# Altium PCB ZYNQ-HS-DEV-PCB.PcbDoc (part 5 of 10)
Units mm, origin at the board's own origin, x right, y up, seen from the top; angles counter-clockwise.
Board outline 125.25 x 111 mm, 10 copper layers (S1 (SIG), S2 (GND), S3 (SIG), S4 (GND), S5 (PWR), S6 (SIG), S7 (GND), S8 (SIG), S9 (GND), S10 (SIG)), stack 1.597 mm thick; 539 components, 408 nets, 2443 pads, 876 vias.
Unrouted connection lines stored in the file: 1310.
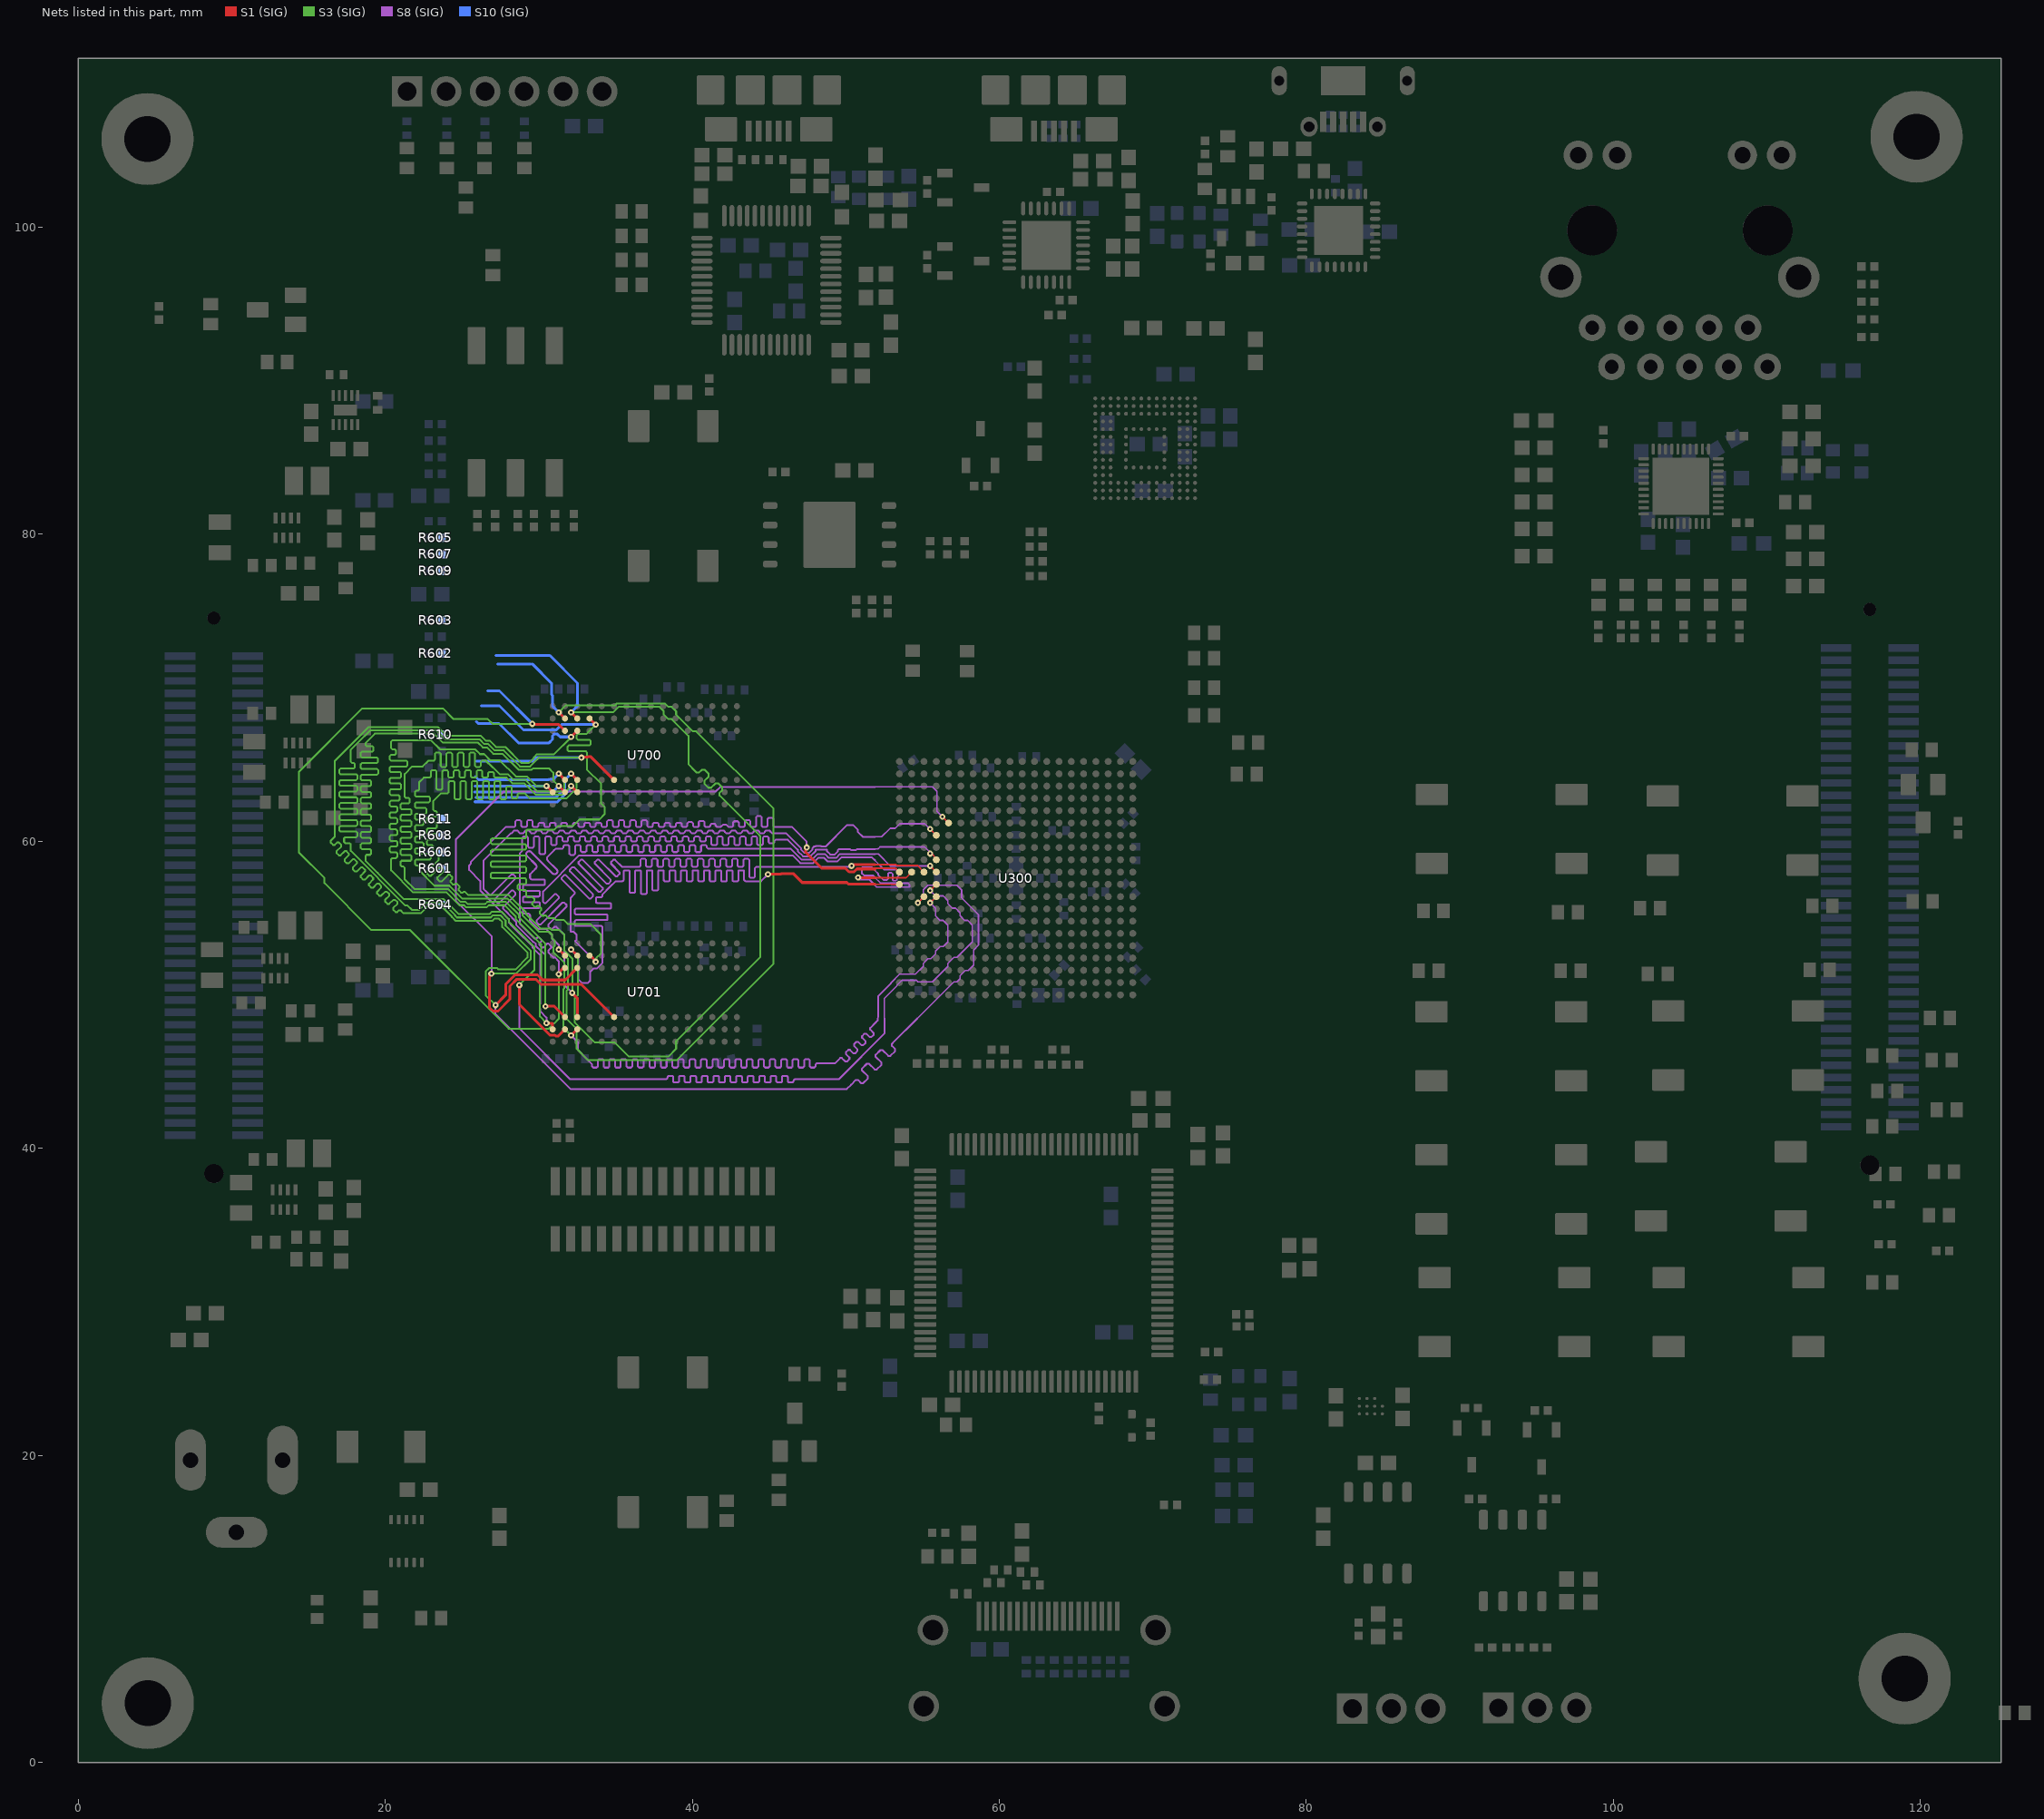
[diagram p9: the nets of this part, all layers, seen from the top]

## Via types
v1: diameter 0.4, hole 0.15, S1 (SIG) to S10 (SIG), tented both sides, 746 vias
v2: diameter 0.5, hole 0.25, S1 (SIG) to S10 (SIG), tented both sides, 108 vias
v3: diameter 0.5, hole 0.2, S1 (SIG) to S10 (SIG), tented both sides, 11 vias
v4: diameter 0.6, hole 0.3, S1 (SIG) to S10 (SIG), tented both sides, 10 vias
v5: diameter 0.45, hole 0.15, S1 (SIG) to S10 (SIG), tented both sides, 1 vias

## Nets (pads, with @x,y where several pads share a name; then routed paths per layer and width w, separated by ;. In a path a pad name is that pad's centre, name@x,y a point inside that pad or via, vN(x,y) a via of type N, cw(c..) or ccw(c..) an arc to the next point about the centre after c; other vN are vias at no path point) (continued)
DDR_A1: R601.2 U300.K2 U700.P7 U701.P7 | length 113.3
  S1 (SIG) w0.11: 51.9,57.615 53.908,57.615 U300.K2@54.288,57.995
  S1 (SIG) w0.18: v1(32.1,64.4) U700.P7@32.5,64 ; v1(32.175,50.125) 32.175,50.11 32.5,49.785 U701.P7@32.5,48.55 ; v1@50.8,57.675 50.86,57.615 51.9,57.615
  S3 (SIG) w0.119: v1(32.1,64.4) 32.46,64.04 32.46,63.451 31.811,62.802 29.402,62.802 29.079,63.125 28.85,63.125 28.683,63.125 28.608,63.05 28.608,62.864 28.534,62.789 28.31,62.789 28.235,62.864 28.235,63.49 28.16,63.564 27.937,63.564 27.862,63.49 27.862,62.807 27.787,62.732 27.563,62.732 27.489,62.807 27.489,63.856 27.414,63.931 27.19,63.931 27.116,63.856 27.116,62.807 27.041,62.732 26.817,62.732 26.742,62.807 26.742,63.856 26.668,63.931 26.444,63.931 26.369,63.856 26.369,62.807 26.295,62.732 26.071,62.732 25.996,62.807 25.996,63.856 25.921,63.931 25.697,63.931 25.623,63.856 25.623,62.807 25.548,62.732 25.324,62.732 25.25,62.807 25.25,63.856 25.175,63.931 24.951,63.931 24.876,63.856 24.876,62.807 24.802,62.732 24.578,62.732 24.503,62.807 24.503,63.856 24.429,63.931 24.205,63.931 24.13,63.856 24.13,63.2 24.055,63.125 23.996,63.125 23.625,63.125 23.125,62.625 23.125,62.425 23.125,62.052 23.2,61.978 23.281,61.978 23.356,61.903 23.356,61.679 23.281,61.605 22.788,61.605 22.713,61.53 22.713,61.306 22.788,61.231 23.281,61.231 23.356,61.157 23.356,60.933 23.281,60.858 22.788,60.858 22.713,60.784 22.713,60.56 22.788,60.485 23.281,60.485 23.356,60.41 23.356,60.186 23.281,60.112 22.788,60.112 22.713,60.037 22.713,59.813 22.788,59.739 23.05,59.739 23.125,59.664 23.125,59.604 23.125,59.32 23.259,59.186 23.482,58.963 23.482,58.791 22.703,58.012 22.703,57.907 22.862,57.748 22.967,57.748 23.506,58.288 23.612,58.288 23.77,58.129 23.77,58.024 23.389,57.643 23.389,57.538 23.548,57.379 23.653,57.379 24.095,57.82 24.2,57.82 24.358,57.662 24.358,57.557 24.245,57.444 24.245,57.338 24.404,57.18 24.509,57.18 24.559,57.229 24.664,57.229 24.823,57.071 24.823,56.965 24.773,56.916 24.773,56.81 24.931,56.652 25.037,56.652 25.086,56.701 25.192,56.701 25.234,56.659 25.399,56.494 28.034,56.494 29.144,55.384 29.144,55.286 30.101,54.329 30.74,54.329 30.838,54.231 31.328,54.231 31.66,53.899 31.66,52.882 32.175,52.366 v1(32.175,50.125)
  S8 (SIG) w0.1: 51.9,57.125 52,57.025 54.14,57.025 54.14,57.185 54.05,57.275 52.25,57.275 51.9,57.625 ; 51.9,58.1 52.1,57.9 52.1,57.825 52.45,57.475 52.675,57.475 52.75,57.55 52.75,57.9 52.8,57.95 52.975,57.95 53.05,57.875 53.05,57.475 53.1,57.425 53.25,57.425 53.325,57.5 53.325,57.65 53.475,57.8 53.475,57.85 53.634,58.009 53.634,58.091 53.575,58.15 52.5,58.15 51.9,58.75
  S8 (SIG) w0.119: v1(32.175,50.125) 31.65,50.65 31.65,51.191 31.66,51.201 31.66,51.499 31.65,51.509 31.65,52.791 31.66,52.801 31.66,53.099 31.65,53.109 31.65,53.591 31.66,53.601 31.66,53.899 31.167,54.392 31.125,54.434 31.019,54.434 30.88,54.294 30.774,54.294 30.616,54.453 30.616,54.558 31.803,55.746 31.803,55.851 31.645,56.01 31.539,56.01 30.107,54.577 30.001,54.577 29.843,54.736 29.843,54.841 31.288,56.287 31.288,56.392 31.13,56.55 31.024,56.55 30.455,55.981 30.35,55.981 30.275,56.056 30.275,56.675 30.275,56.725 32.625,59.075 46.537,59.075 47.029,58.583 47.871,58.583 48.225,58.936 48.56,58.936 48.794,58.702 49.456,58.702 49.704,58.95 51.7,58.95 51.9,58.75 ; v1@50.8,57.646 50.942,57.504 51.521,57.504 51.9,57.125 ; 51.9,57.625 51.75,57.775 51.175,57.775 51.05,57.9 51.05,58.275 51.075,58.3 51.7,58.3 51.9,58.1
  S10 (SIG) w0.18: 25.9,62.85 31.102,62.85 31.69,63.438 31.69,63.99 v1(32.1,64.4)
  other v1: 50.799,57.645
DDR_A2: R602.2 U300.M3 U700.P3 U701.P3 | length 118.1
  S1 (SIG) w0.11: v1(54.688,55.995) U300.M3@55.088,56.395
  S1 (SIG) w0.18: v1(27.175,49.325) 27.832,49.982 27.832,50.68 28.447,51.295 29.911,51.295 30.246,50.96 31.71,50.96 U701.P3@32.5,51.75 ; v1(32.1,66.8) U700.P3@32.5,67.2
  S3 (SIG) w0.119: v1(27.175,49.325) 26.54,49.96 26.54,51.524 26.751,51.735 27.282,51.735 27.351,51.665 28.499,51.665 29.26,52.426 29.26,52.762 27.61,54.412 27.61,54.749 27.399,54.96 27.101,54.96 26.961,54.819 24.571,54.819 24.33,55.06 24.33,55.084 23.621,55.792 22.779,55.792 22.297,55.31 21.19,55.31 21.038,55.462 20.995,55.505 20.89,55.505 20.775,55.389 20.669,55.389 20.511,55.548 20.511,55.653 20.783,55.926 20.783,56.031 20.625,56.19 20.519,56.19 20.247,55.917 20.141,55.917 19.983,56.076 19.983,56.181 20.255,56.454 20.255,56.559 20.097,56.717 19.992,56.717 19.719,56.445 19.614,56.445 19.455,56.603 19.455,56.709 19.728,56.981 19.728,57.087 19.569,57.245 19.464,57.245 19.191,56.973 19.086,56.973 18.927,57.131 18.927,57.237 19.2,57.509 19.2,57.615 19.042,57.773 18.936,57.773 18.664,57.501 18.558,57.501 18.4,57.659 18.4,57.764 18.672,58.037 18.672,58.142 18.514,58.301 18.408,58.301 18.136,58.028 18.03,58.028 17.872,58.187 17.872,58.292 18.144,58.565 18.144,58.67 17.986,58.829 17.881,58.829 17.608,58.556 17.502,58.556 17.344,58.714 17.344,58.82 17.617,59.092 17.617,59.198 17.458,59.356 17.353,59.356 17.08,59.084 16.975,59.084 16.816,59.242 16.816,59.348 17.126,59.658 17.126,59.763 16.968,59.921 16.862,59.921 16.699,59.758 16.594,59.758 16.435,59.917 16.435,60.022 16.703,60.29 16.703,60.675 16.703,65.228 18.921,67.446 23.41,67.446 23.992,66.865 26.222,66.865 26.533,66.554 26.791,66.554 27.203,66.142 27.814,66.142 28.86,65.096 29.34,65.096 29.679,65.435 29.679,65.471 29.877,65.669 30.988,65.669 32.1,66.781 v1(32.1,66.8)
  S8 (SIG) w0.1: 54.648,48.45 57.043,50.845 57.233,50.845 57.438,51.05 57.438,51.24 57.782,51.585 57.972,51.585 58.317,51.929 58.317,52.919 58.638,53.24 58.638,55.223 57.538,56.323 57.538,56.84 57.233,57.145 55.343,57.145 55.042,56.844 55.042,56.349 v1(54.688,55.995)
  S8 (SIG) w0.119: v1(27.175,49.325) 27.175,48.746 32.06,43.862 50.059,43.862 50.336,44.139 50.648,44.45 50.781,44.45 50.992,44.24 51.125,44.24 51.435,44.55 51.435,44.683 51.054,45.065 51.054,45.198 51.364,45.508 51.497,45.508 51.879,45.127 52.012,45.127 52.322,45.437 52.322,45.57 51.941,45.952 51.941,46.085 52.251,46.395 52.384,46.395 52.766,46.014 52.899,46.014 53.209,46.324 53.209,46.457 52.999,46.668 52.999,46.801 53.041,46.843 54.648,48.45
  S10 (SIG) w0.18: 25.935,67.79 26.05,67.675 27.404,67.675 28.669,66.41 30.662,66.41 30.89,66.638 30.89,66.875 30.995,66.98 31.204,66.98 31.384,66.8 v1(32.1,66.8)
DDR_A3: R603.2 U300.K3 U700.N2 U701.N2 | length 113.3
  S1 (SIG) w0.11: 51.9,58.48 53.265,58.48 53.33,58.415 54.679,58.415 55.088,58.006 U300.K3@55.088,57.995
  S1 (SIG) w0.18: U701.N2@33.3,52.55 33.361,52.55 33.7,52.211 v1(33.7,52.15) ; U700.N2@33.3,68 v1(33.7,67.6) ; v1(50.368,58.4) 50.428,58.4 50.508,58.48 51.9,58.48
  S3 (SIG) w0.119: v1(33.7,52.15) 33.749,52.199 33.749,52.398 34.06,52.708 34.06,53.899 33.344,54.614 31.874,54.614 31.6,54.888 31.11,54.888 31.012,54.986 30.639,54.986 30.488,55.137 30.445,55.18 30.34,55.18 30.313,55.153 30.207,55.153 30.049,55.311 30.049,55.417 30.156,55.523 30.156,55.629 29.997,55.787 29.892,55.787 29.834,55.73 29.729,55.73 29.57,55.888 29.57,55.994 29.709,56.132 29.709,56.238 29.551,56.396 29.445,56.396 29.39,56.341 29.284,56.341 29.175,56.45 29.175,56.7 29.175,56.76 29.1,56.834 28.699,56.834 28.624,56.909 28.624,57.133 28.699,57.207 29.102,57.207 29.176,57.282 29.176,57.506 29.102,57.581 26.944,57.581 26.869,57.655 26.869,57.879 26.944,57.954 29.102,57.954 29.176,58.028 29.176,58.252 29.102,58.327 26.944,58.327 26.869,58.402 26.869,58.626 26.944,58.7 29.101,58.7 29.176,58.775 29.176,58.999 29.101,59.073 26.944,59.073 26.869,59.148 26.869,59.372 26.944,59.447 29.101,59.447 29.175,59.521 29.175,59.745 29.101,59.82 26.944,59.82 26.869,59.894 26.869,60.118 26.944,60.193 29.1,60.193 29.175,60.268 29.175,60.459 29.175,60.694 29.245,60.764 31.012,60.764 31.231,60.983 32.211,60.983 32.65,61.421 33.94,61.421 34.279,61.76 34.279,62.24 34.06,62.459 34.06,63.749 33.125,64.684 33.125,64.987 33.125,65.291 33.135,65.301 33.135,65.599 33.125,65.609 33.125,65.793 33.05,65.868 31.944,65.868 31.87,65.943 31.87,66.167 31.944,66.241 33.302,66.241 33.377,66.316 33.377,66.54 33.302,66.614 32.534,66.614 32.46,66.689 32.46,66.913 32.534,66.988 33.088,66.988 33.241,67.141 v1(33.7,67.6)
  S8 (SIG) w0.119: v1(33.7,52.15) 32.354,53.496 32.46,53.601 32.46,53.899 32.249,54.11 32.075,54.11 32.075,56.325 32.288,56.537 32.33,56.58 32.33,56.685 31.49,57.525 31.49,57.63 31.649,57.789 31.754,57.789 33.268,56.275 33.373,56.275 33.532,56.433 33.532,56.539 32.018,58.052 32.018,58.158 32.176,58.316 32.282,58.316 33.891,56.707 33.997,56.707 34.155,56.865 34.155,56.971 32.587,58.539 32.587,58.645 32.745,58.803 32.851,58.803 34.419,57.235 34.525,57.235 34.683,57.393 34.683,57.498 33.642,58.539 33.642,58.645 33.801,58.803 33.906,58.803 34.993,57.716 35.099,57.716 35.257,57.875 35.257,57.98 34.698,58.539 34.698,58.645 34.856,58.803 34.962,58.803 35.438,58.327 35.679,58.327 36.475,58.327 36.535,58.327 36.609,58.402 36.609,58.781 36.684,58.856 36.908,58.856 36.982,58.781 36.982,58.402 37.057,58.327 37.281,58.327 37.356,58.402 37.356,58.781 37.43,58.856 37.654,58.856 37.729,58.781 37.729,58.402 37.803,58.327 38.027,58.327 38.102,58.402 38.102,58.781 38.177,58.856 38.401,58.856 38.475,58.781 38.475,58.402 38.55,58.327 38.774,58.327 38.848,58.402 38.848,58.781 38.923,58.856 39.147,58.856 39.222,58.781 39.222,58.402 39.296,58.327 39.52,58.327 39.595,58.402 39.595,58.781 39.669,58.856 39.893,58.856 39.968,58.781 39.968,58.402 40.043,58.327 40.267,58.327 40.341,58.402 40.341,58.781 40.416,58.856 40.64,58.856 40.714,58.781 40.714,58.402 40.789,58.327 41.013,58.327 41.088,58.402 41.088,58.781 41.162,58.856 41.386,58.856 41.461,58.781 41.461,58.402 41.535,58.327 41.759,58.327 41.834,58.402 41.834,58.781 41.909,58.856 42.132,58.856 42.207,58.781 42.207,58.402 42.282,58.327 42.506,58.327 42.58,58.402 42.58,58.781 42.655,58.856 42.879,58.856 42.953,58.781 42.953,58.402 43.028,58.327 43.252,58.327 43.327,58.402 43.327,58.781 43.401,58.856 43.625,58.856 43.7,58.781 43.7,57.694 43.775,57.619 43.998,57.619 44.073,57.694 44.073,58.253 44.148,58.327 45.875,58.327 50.097,58.327 50.116,58.346 50.315,58.346 v1(50.368,58.4)
  S10 (SIG) w0.18: 26.243,68.825 27.429,68.825 28.994,67.26 31.147,67.26 31.487,67.6 v1(33.7,67.6)
DDR_A4: R604.2 U300.M4 U700.P8 U701.P8 | length 111.3
  S1 (SIG) w0.11: v1(55.488,55.995) U300.M4@55.888,56.395
  S1 (SIG) w0.18: v1(32.1,47.35) U701.P8@32.5,47.75 ; v1(32.1,63.6) U700.P8@32.5,63.2
  S3 (SIG) w0.119: v1(32.1,47.35) 31.596,47.854 31.596,50.365 31.66,50.428 31.66,52.082 30.94,52.801 30.94,53.099 31.039,53.197 31.039,53.503 30.86,53.682 30.86,53.899 30.649,54.11 30.01,54.11 28.925,55.195 28.925,55.294 27.944,56.275 24.999,56.275 24.166,57.107 23.193,57.107 22.2,58.1 22.2,58.3 22.2,58.36 22.125,58.434 22.001,58.434 21.927,58.509 21.927,58.733 22.001,58.807 22.881,58.807 22.956,58.882 22.956,59.106 22.881,59.181 22.001,59.181 21.927,59.255 21.927,59.479 22.001,59.554 22.42,59.554 22.494,59.628 22.494,59.852 22.42,59.927 22.001,59.927 21.927,60.002 21.927,60.226 22.001,60.3 22.42,60.3 22.494,60.375 22.494,60.599 22.42,60.673 22.001,60.673 21.927,60.748 21.927,60.972 22.001,61.047 22.42,61.047 22.494,61.121 22.494,61.345 22.42,61.42 22.001,61.42 21.927,61.494 21.927,61.718 22.001,61.793 22.601,61.793 22.676,61.868 22.676,62.091 22.601,62.166 22.001,62.166 21.927,62.241 21.927,62.465 22.001,62.539 22.831,62.539 22.906,62.614 22.906,62.838 22.831,62.913 22.001,62.913 21.927,62.987 21.927,63.211 22.001,63.286 22.125,63.286 22.2,63.36 22.2,63.694 22.2,63.85 22.5,64.15 22.825,64.15 22.885,64.15 22.959,64.225 22.959,64.553 23.034,64.627 23.258,64.627 23.332,64.553 23.332,63.419 23.407,63.344 23.631,63.344 23.706,63.419 23.706,64.553 23.78,64.627 24.004,64.627 24.079,64.553 24.079,64.225 24.153,64.15 24.377,64.15 24.452,64.225 24.452,64.553 24.527,64.627 24.751,64.627 24.825,64.553 24.825,64.225 24.9,64.15 25.124,64.15 25.198,64.225 25.198,64.553 25.273,64.627 25.497,64.627 25.572,64.553 25.572,64.225 25.646,64.15 25.87,64.15 25.945,64.225 25.945,64.553 26.019,64.627 26.243,64.627 26.318,64.553 26.318,64.225 26.393,64.15 26.617,64.15 26.691,64.225 26.691,64.448 26.766,64.522 26.99,64.522 27.064,64.448 27.064,64.225 27.139,64.15 27.803,64.15 27.898,64.15 28.267,63.781 29.043,63.781 29.803,63.021 31.54,63.021 32.1,63.581 v1(32.1,63.6)
  S8 (SIG) w0.1: 52.072,48.45 52.081,48.45 52.081,48.537 52.1,48.556 52.1,48.62 52.11,48.629 52.11,49.927 52.938,50.755 52.938,50.788 53.494,51.345 54.533,51.345 55.038,51.85 55.038,52.04 55.346,52.348 55.536,52.348 55.844,52.656 55.844,52.846 56.149,53.151 56.339,53.151 56.638,53.45 56.638,54.54 56.336,54.842 56.146,54.842 55.844,55.144 55.844,55.639 v1(55.488,55.995)
  S8 (SIG) w0.119: v1(32.1,47.35) 32.54,46.91 32.54,46.401 33.08,45.861 33.468,45.474 33.468,45.332 33.543,45.257 33.766,45.257 33.841,45.332 33.841,45.737 33.916,45.812 34.14,45.812 34.214,45.737 34.214,45.332 34.289,45.257 34.513,45.257 34.587,45.332 34.587,45.737 34.662,45.812 34.886,45.812 34.961,45.737 34.961,45.332 35.035,45.257 35.259,45.257 35.334,45.332 35.334,45.737 35.409,45.812 35.632,45.812 35.707,45.737 35.707,45.332 35.782,45.257 36.006,45.257 36.08,45.332 36.08,45.737 36.155,45.812 36.379,45.812 36.453,45.737 36.453,45.332 36.528,45.257 36.752,45.257 36.827,45.332 36.827,45.737 36.901,45.812 37.125,45.812 37.2,45.737 37.2,45.332 37.274,45.257 37.498,45.257 37.573,45.332 37.573,45.737 37.648,45.812 37.872,45.812 37.946,45.737 37.946,45.332 38.021,45.257 38.245,45.257 38.319,45.332 38.319,45.737 38.394,45.812 38.618,45.812 38.693,45.737 38.693,45.332 38.767,45.257 38.991,45.257 39.066,45.332 39.066,45.737 39.14,45.812 39.364,45.812 39.439,45.737 39.439,45.332 39.514,45.257 39.738,45.257 39.812,45.332 39.812,45.737 39.887,45.812 40.111,45.812 40.185,45.737 40.185,45.332 40.26,45.257 40.484,45.257 40.559,45.332 40.559,45.737 40.633,45.812 40.857,45.812 40.932,45.737 40.932,45.332 41.006,45.257 41.23,45.257 41.305,45.332 41.305,45.737 41.38,45.812 41.603,45.812 41.678,45.737 41.678,45.332 41.753,45.257 41.977,45.257 42.051,45.332 42.051,45.737 42.126,45.812 42.35,45.812 42.424,45.737 42.424,45.332 42.499,45.257 42.723,45.257 42.798,45.332 42.798,45.737 42.872,45.812 43.096,45.812 43.171,45.737 43.171,45.332 43.245,45.257 43.469,45.257 43.544,45.332 43.544,45.737 43.619,45.812 43.843,45.812 43.917,45.737 43.917,45.332 43.992,45.257 44.216,45.257 44.29,45.332 44.29,45.737 44.365,45.812 44.589,45.812 44.664,45.737 44.664,45.332 44.738,45.257 44.962,45.257 45.037,45.332 45.037,45.737 45.111,45.812 45.335,45.812 45.41,45.737 45.41,45.332 45.485,45.257 45.709,45.257 45.783,45.332 45.783,45.737 45.858,45.812 46.082,45.812 46.156,45.737 46.156,45.332 46.231,45.257 46.455,45.257 46.53,45.332 46.53,45.737 46.604,45.812 46.828,45.812 46.903,45.737 46.903,45.332 46.977,45.257 47.201,45.257 47.276,45.332 47.276,45.737 47.351,45.812 47.574,45.812 47.649,45.737 47.649,45.332 47.724,45.257 47.948,45.257 48.022,45.332 48.022,45.45 48.097,45.525 48.157,45.525 48.171,45.525 49.275,45.525 49.632,45.882 49.737,45.882 49.964,45.655 50.07,45.655 50.228,45.813 50.228,45.918 50,46.146 50,46.252 50.159,46.41 50.264,46.41 50.492,46.182 50.597,46.182 50.756,46.341 50.756,46.446 50.528,46.674 50.528,46.779 50.686,46.938 50.792,46.938 51.02,46.71 51.125,46.71 51.284,46.868 51.284,46.974 51.056,47.202 51.056,47.307 51.214,47.465 51.32,47.465 51.547,47.238 51.653,47.238 51.811,47.396 51.811,47.502 51.584,47.729 51.584,47.834 51.947,48.197 52.072,48.322 52.072,48.45
  S10 (SIG) w0.18: 25.825,62.575 26.375,62.575 26.37,62.57 31.218,62.57 31.97,63.322 31.97,63.41 32.1,63.54 v1(32.1,63.6)
DDR_A5: R605.2 U300.L1 U700.P2 U701.P2 | length 114.2
  S1 (SIG) w0.11: 51.9,57.197 53.485,57.197 U300.L1@53.488,57.195
  S1 (SIG) w0.18: v1(32.1,52.95) U701.P2@32.5,52.55 ; v1(32.1,68.4) U700.P2@32.5,68 ; v1(44.925,57.85) 45.752,57.85 45.802,57.9 46.57,57.9 47.155,57.314 50.068,57.314 50.185,57.197 51.9,57.197
  S3 (SIG) w0.119: v1(32.1,52.95) 32.535,52.515 32.535,49.976 32.321,49.763 32.321,48.22 33.632,46.91 34.922,46.91 35.86,45.971 38.43,45.971 38.94,46.482 38.94,46.972 44.419,52.451 44.419,60.336 44.377,60.378 41.776,62.979 41.776,63.156 41.949,63.329 41.949,63.506 41.682,63.772 41.505,63.772 41.223,63.49 41.045,63.49 40.779,63.756 40.779,63.933 41.062,64.216 41.062,64.393 40.795,64.659 40.618,64.659 40.446,64.487 40.268,64.487 40.226,64.529 39.74,65.014 39.74,66.868 38.649,67.96 38.432,67.96 38.14,68.251 38.14,68.468 37.849,68.76 35.192,68.76 34.833,68.4 v1(32.1,68.4)
  S8 (SIG) w0.119: v1(32.1,52.95) 32.575,52.475 32.575,51 32.8,50.775 33.2,50.775 33.34,50.915 33.34,51.499 33.551,51.71 33.768,51.71 34.14,52.082 34.14,54.311 34.14,54.371 ccw(c34.021,54.371) 34.021,54.49 32.422,54.49 cw(c32.422,54.565) 32.348,54.565 32.348,54.788 cw(c32.422,54.788) 32.422,54.863 34.395,54.863 ccw(c34.395,54.938) 34.47,54.938 34.47,55.162 ccw(c34.395,55.162) 34.395,55.236 32.422,55.236 cw(c32.422,55.311) 32.348,55.311 32.348,55.535 cw(c32.422,55.535) 32.422,55.609 34.618,55.609 ccw(c34.618,55.684) 34.693,55.684 34.693,55.908 ccw(c34.618,55.908) 34.618,55.983 33.795,55.983 cw(c33.795,56.057) 33.721,56.057 33.721,56.281 cw(c33.795,56.281) 33.795,56.356 34.021,56.356 ccw(c34.021,56.475) 34.14,56.475 34.14,56.54 34.632,57.032 35,57.4 35.35,57.4 35.41,57.4 ccw(c35.41,57.519) 35.529,57.519 35.529,58.033 cw(c35.603,58.033) 35.603,58.108 35.827,58.108 cw(c35.827,58.033) 35.902,58.033 35.902,56.72 ccw(c35.977,56.72) 35.977,56.646 36.201,56.646 ccw(c36.201,56.72) 36.275,56.72 36.275,58.033 cw(c36.35,58.033) 36.35,58.108 36.574,58.108 cw(c36.574,58.033) 36.648,58.033 36.648,56.645 ccw(c36.723,56.645) 36.723,56.571 36.947,56.571 ccw(c36.947,56.645) 37.022,56.645 37.022,58.033 cw(c37.096,58.033) 37.096,58.108 37.32,58.108 cw(c37.32,58.033) 37.395,58.033 37.395,56.878 ccw(c37.469,56.878) 37.469,56.803 37.693,56.803 ccw(c37.693,56.878) 37.768,56.878 37.768,58.033 cw(c37.843,58.033) 37.843,58.108 38.067,58.108 cw(c38.067,58.033) 38.141,58.033 38.141,57.473 ccw(c38.216,57.473) 38.216,57.398 38.44,57.398 ccw(c38.44,57.473) 38.514,57.473 38.514,58.033 cw(c38.589,58.033) 38.589,58.108 38.813,58.108 cw(c38.813,58.033) 38.888,58.033 38.888,57.473 ccw(c38.962,57.473) 38.962,57.398 39.186,57.398 ccw(c39.186,57.473) 39.261,57.473 39.261,58.033 cw(c39.335,58.033) 39.335,58.108 39.559,58.108 cw(c39.559,58.033) 39.634,58.033 39.634,57.473 ccw(c39.709,57.473) 39.709,57.398 39.932,57.398 ccw(c39.932,57.473) 40.007,57.473 40.007,58.033 cw(c40.082,58.033) 40.082,58.108 40.306,58.108 cw(c40.306,58.033) 40.38,58.033 40.38,57.473 ccw(c40.455,57.473) 40.455,57.398 40.679,57.398 ccw(c40.679,57.473) 40.753,57.473 40.753,58.033 cw(c40.828,58.033) 40.828,58.108 41.052,58.108 cw(c41.052,58.033) 41.127,58.033 41.127,57.473 ccw(c41.201,57.473) 41.201,57.398 41.425,57.398 ccw(c41.425,57.473) 41.5,57.473 41.5,58.033 cw(c41.574,58.033) 41.574,58.108 41.798,58.108 cw(c41.798,58.033) 41.873,58.033 41.873,57.473 ccw(c41.948,57.473) 41.948,57.398 42.172,57.398 ccw(c42.172,57.473) 42.246,57.473 42.246,58.033 cw(c42.321,58.033) 42.321,58.108 42.545,58.108 cw(c42.545,58.033) 42.619,58.033 42.619,57.473 ccw(c42.694,57.473) 42.694,57.398 42.918,57.398 ccw(c42.918,57.473) 42.993,57.473 42.993,58.033 cw(c43.067,58.033) 43.067,58.108 43.291,58.108 cw(c43.291,58.033) 43.366,58.033 43.366,57.519 ccw(c43.485,57.519) 43.485,57.4 44.022,57.4 44.475,57.4 v1(44.925,57.85)
  S10 (SIG) w0.18: 27.2,72.1 30.719,72.1 32.515,70.304 32.515,69.546 32.51,69.541 32.51,68.81 v1(32.1,68.4)
DDR_A6: R606.2 U300.L4 U700.R8 U701.R8 | length 115.4
  S1 (SIG) w0.11: v1(55.488,56.795) U300.L4@55.888,57.195
  S1 (SIG) w0.18: v1(28.725,50.625) 28.725,49.373 30.738,47.36 31.042,47.36 31.095,47.307 31.257,47.307 U701.R8@31.7,47.75 ; v1(31.3,63.6) U700.R8@31.7,63.2
  S3 (SIG) w0.119: v1(28.725,50.625) 29.698,51.598 29.698,53.114 28.048,54.764 28.048,54.931 27.581,55.398 26.919,55.398 26.779,55.258 24.776,55.258 23.803,56.231 21.204,56.231 19.497,57.937 18.7,58.735 18.7,59.042 18.775,59.116 18.993,59.116 19.068,59.191 19.068,59.415 18.993,59.49 18.464,59.49 18.39,59.564 18.39,59.788 18.464,59.863 18.993,59.863 19.068,59.937 19.068,60.161 18.993,60.236 18.471,60.236 18.396,60.311 18.396,60.534 18.471,60.609 18.993,60.609 19.068,60.684 19.068,60.908 18.993,60.982 18.471,60.982 18.396,61.057 18.396,61.281 18.471,61.355 18.993,61.355 19.068,61.43 19.068,61.654 18.993,61.729 18.471,61.729 18.396,61.803 18.396,62.027 18.471,62.102 18.993,62.102 19.068,62.176 19.068,62.4 18.993,62.475 18.471,62.475 18.396,62.55 18.396,62.774 18.471,62.848 18.993,62.848 19.068,62.923 19.068,63.147 18.993,63.221 18.471,63.221 18.396,63.296 18.396,63.52 18.471,63.595 18.993,63.595 19.068,63.669 19.068,63.893 18.993,63.968 18.471,63.968 18.396,64.042 18.396,64.266 18.471,64.341 19.455,64.341 19.529,64.416 19.529,64.64 19.455,64.714 18.464,64.714 18.39,64.789 18.39,65.013 18.464,65.087 19.439,65.087 19.514,65.162 19.514,65.386 19.439,65.461 18.464,65.461 18.39,65.535 18.39,65.759 18.464,65.834 19.145,65.834 19.22,65.908 19.22,66.132 19.145,66.207 18.775,66.207 18.7,66.282 18.7,66.349 18.7,66.39 19.318,67.008 23.172,67.008 23.753,66.426 26.04,66.426 26.351,66.116 26.609,66.116 27.021,65.704 27.632,65.704 28.679,64.658 29.521,64.658 29.623,64.76 30.649,64.76 30.94,64.468 30.94,63.96 v1(31.3,63.6)
  S8 (SIG) w0.1: 52.51,48.45 52.51,49.761 53.338,50.589 53.338,50.623 53.66,50.945 54.596,50.945 54.696,50.845 55.633,50.845 56.638,51.85 56.638,52.04 57.043,52.445 57.233,52.445 58.238,53.45 58.238,54.54 57.934,54.843 57.744,54.843 57.44,55.147 57.44,55.337 57.137,55.641 56.947,55.641 56.643,55.944 56.643,56.134 56.34,56.438 55.845,56.438 v1(55.488,56.795)
  S8 (SIG) w0.119: v1(28.725,50.625) 28.725,47.816 32.041,44.5 32.35,44.5 38.26,44.5 ccw(c38.26,44.619) 38.379,44.619 38.379,44.631 cw(c38.454,44.631) 38.454,44.706 38.678,44.706 cw(c38.678,44.631) 38.752,44.631 38.752,44.375 ccw(c38.827,44.375) 38.827,44.3 39.051,44.3 ccw(c39.051,44.375) 39.126,44.375 39.126,44.631 cw(c39.2,44.631) 39.2,44.706 39.424,44.706 cw(c39.424,44.631) 39.499,44.631 39.499,44.375 ccw(c39.573,44.375) 39.573,44.3 39.797,44.3 ccw(c39.797,44.375) 39.872,44.375 39.872,44.631 cw(c39.947,44.631) 39.947,44.706 40.17,44.706 cw(c40.17,44.631) 40.245,44.631 40.245,44.375 ccw(c40.32,44.375) 40.32,44.3 40.544,44.3 ccw(c40.544,44.375) 40.618,44.375 40.618,44.631 cw(c40.693,44.631) 40.693,44.706 40.917,44.706 cw(c40.917,44.631) 40.991,44.631 40.991,44.375 ccw(c41.066,44.375) 41.066,44.3 41.29,44.3 ccw(c41.29,44.375) 41.365,44.375 41.365,44.631 cw(c41.439,44.631) 41.439,44.706 41.663,44.706 cw(c41.663,44.631) 41.738,44.631 41.738,44.375 ccw(c41.812,44.375) 41.812,44.3 42.036,44.3 ccw(c42.036,44.375) 42.111,44.375 42.111,44.631 cw(c42.186,44.631) 42.186,44.706 42.41,44.706 cw(c42.41,44.631) 42.484,44.631 42.484,44.375 ccw(c42.559,44.375) 42.559,44.3 42.783,44.3 ccw(c42.783,44.375) 42.857,44.375 42.857,44.631 cw(c42.932,44.631) 42.932,44.706 43.156,44.706 cw(c43.156,44.631) 43.231,44.631 43.231,44.375 ccw(c43.305,44.375) 43.305,44.3 43.529,44.3 ccw(c43.529,44.375) 43.604,44.375 43.604,44.631 cw(c43.678,44.631) 43.678,44.706 43.902,44.706 cw(c43.902,44.631) 43.977,44.631 43.977,44.375 ccw(c44.052,44.375) 44.052,44.3 44.276,44.3 ccw(c44.276,44.375) 44.35,44.375 44.35,44.631 cw(c44.425,44.631) 44.425,44.706 44.649,44.706 cw(c44.649,44.631) 44.723,44.631 44.723,44.375 ccw(c44.798,44.375) 44.798,44.3 45.022,44.3 ccw(c45.022,44.375) 45.097,44.375 45.097,44.631 cw(c45.171,44.631) 45.171,44.706 45.395,44.706 cw(c45.395,44.631) 45.47,44.631 45.47,44.375 ccw(c45.544,44.375) 45.544,44.3 45.768,44.3 ccw(c45.768,44.375) 45.843,44.375 45.843,44.631 cw(c45.918,44.631) 45.918,44.706 46.141,44.706 cw(c46.141,44.631) 46.216,44.631 46.216,44.375 ccw(c46.291,44.375) 46.291,44.3 46.515,44.3 ccw(c46.515,44.375) 46.589,44.375 46.589,44.381 cw(c46.709,44.381) 46.709,44.5 46.768,44.5 49.535,44.5 52.51,47.475 52.51,48.45
  S10 (SIG) w0.18: 25.8,63.21 30.91,63.21 v1(31.3,63.6)
DDR_A7: R607.2 U300.K4 U700.R2 U701.R2 | length 112.1
  S1 (SIG) w0.11: v1(55.488,58.395) U300.K4@55.888,57.995
  S1 (SIG) w0.18: v1(31.3,52.95) U701.R2@31.7,52.55 ; v1(31.3,68.4) U700.R2@31.7,68
  S3 (SIG) w0.119: v1(31.3,52.95) 31.3,52.931 31.879,52.353 31.879,50.337 31.815,50.274 31.815,48.416 32.46,47.772 32.46,46.482 33.189,45.752 39.011,45.752 45.285,52.026 45.285,62.124 40.249,67.16 40.032,67.16 38.94,68.251 38.94,68.468 38.649,68.76 38.432,68.76 38.213,68.979 35.084,68.979 34.945,68.84 31.74,68.84 v1(31.3,68.4)
  S8 (SIG) w0.1: 51.9,59.169 52.111,59.169 52.886,58.395 v1(55.488,58.395)
  S8 (SIG) w0.119: v1(31.3,52.95) 31.3,53.225 30.86,53.665 30.86,53.899 30.484,54.275 29.994,54.275 29.425,54.844 29.425,55.1 29.425,55.16 ccw(c29.306,55.16) 29.306,55.279 29.044,55.279 cw(c29.044,55.353) 28.969,55.353 28.969,55.577 cw(c29.044,55.577) 29.044,55.652 29.983,55.652 ccw(c29.983,55.727) 30.058,55.727 30.058,55.951 ccw(c29.983,55.951) 29.983,56.025 29.044,56.025 cw(c29.044,56.1) 28.969,56.1 28.969,56.324 cw(c29.044,56.324) 29.044,56.398 29.981,56.398 ccw(c29.981,56.473) 30.056,56.473 30.056,56.697 ccw(c29.981,56.697) 29.981,56.772 29.044,56.772 cw(c29.044,56.846) 28.969,56.846 28.969,57.07 cw(c29.044,57.07) 29.044,57.145 30.31,57.145 ccw(c30.31,57.219) 30.385,57.219 30.385,57.443 ccw(c30.31,57.443) 30.31,57.518 29.544,57.518 cw(c29.544,57.637) 29.425,57.637 29.425,57.85 29.6,58.025 29.75,58.175 29.792,58.217 ccw(c29.66,58.349) 29.792,58.481 29.236,59.037 cw(c29.368,59.169) 29.236,59.301 cw(c29.368,59.169) 29.5,59.301 30.889,57.912 ccw(c31.021,58.044) 31.152,57.912 ccw(c31.021,58.044) 31.152,58.176 30.584,58.745 cw(c30.716,58.877) 30.584,59.009 30.988,59.412 31.1,59.525 31.475,59.525 31.535,59.525 31.609,59.6 31.609,59.689 31.684,59.763 31.908,59.763 31.982,59.689 31.982,59.19 32.057,59.116 32.281,59.116 32.356,59.19 32.356,59.689 32.43,59.763 32.654,59.763 32.729,59.689 32.729,59.369 32.803,59.294 33.027,59.294 33.102,59.369 33.102,59.689 33.177,59.763 33.401,59.763 33.475,59.689 33.475,59.369 33.55,59.294 33.774,59.294 33.848,59.369 33.848,59.689 33.923,59.763 34.147,59.763 34.222,59.689 34.222,59.369 34.296,59.294 34.52,59.294 34.595,59.369 34.595,59.689 34.669,59.763 34.893,59.763 34.968,59.689 34.968,59.369 35.043,59.294 35.267,59.294 35.341,59.369 35.341,59.689 35.416,59.763 35.64,59.763 35.714,59.689 35.714,59.369 35.789,59.294 36.013,59.294 36.088,59.369 36.088,59.689 36.162,59.763 36.386,59.763 36.461,59.689 36.461,59.369 36.535,59.294 36.759,59.294 36.834,59.369 36.834,59.689 36.909,59.763 37.132,59.763 37.207,59.689 37.207,59.369 37.282,59.294 37.506,59.294 37.58,59.369 37.58,59.689 37.655,59.763 37.879,59.763 37.953,59.689 37.953,59.369 38.028,59.294 38.252,59.294 38.327,59.369 38.327,59.689 38.401,59.763 38.625,59.763 38.7,59.689 38.7,59.369 38.775,59.294 38.998,59.294 39.073,59.369 39.073,59.689 39.148,59.763 39.372,59.763 39.446,59.689 39.446,59.369 39.521,59.294 39.745,59.294 39.819,59.369 39.819,59.689 39.894,59.763 40.118,59.763 40.193,59.689 40.193,59.369 40.267,59.294 40.491,59.294 40.566,59.369 40.566,59.689 40.64,59.763 40.864,59.763 40.939,59.689 40.939,59.6 41.014,59.525 41.325,59.525 46.397,59.525 47.119,58.802 47.781,58.802 48.134,59.156 48.651,59.156 48.885,58.921 49.365,58.921 49.613,59.169 51.9,59.169
  S10 (SIG) w0.18: 27.3,71.55 29.469,71.55 ; 29.569,71.55 30.825,70.294 30.825,69.556 30.89,69.491 30.89,68.81 v1(31.3,68.4)
DDR_A8: R608.2 U300.K1 U700.T8 U701.T8 | length 109.7
  S1 (SIG) w0.11: 51.9,58.2 51.9,58.235 52.002,58.235 52.011,58.244 53.204,58.244 53.243,58.205 53.278,58.205 U300.K1@53.488,57.995
  S1 (SIG) w0.18: v1(30.5,48.15) 30.87,48.15 30.9,48.12 U701.T8@30.9,47.75 ; v1(30.5,63.6) U700.T8@30.9,63.2 ; v1(47.45,59.6) 47.38,59.6 47.38,59.29 48.425,58.244 49.978,58.244 49.978,58.238 50.207,58.01 50.53,58.01 50.72,58.2 51.9,58.2
  S3 (SIG) w0.119: v1(30.5,48.15) 30.065,48.585 30.065,50.942 30.136,51.013 30.136,53.295 28.486,54.945 28.486,55.112 27.762,55.836 26.738,55.836 26.598,55.696 25.267,55.696 25.127,55.836 24.817,55.836 23.984,56.669 21.806,56.669 20.375,58.1 20.375,58.4 20.375,58.833 20.45,58.907 20.693,58.907 20.768,58.982 20.768,59.206 20.693,59.281 20.358,59.281 20.283,59.355 20.283,59.579 20.358,59.654 20.693,59.654 20.768,59.728 20.768,59.952 20.693,60.027 20.358,60.027 20.283,60.102 20.283,60.326 20.358,60.4 20.693,60.4 20.768,60.475 20.768,60.699 20.693,60.773 20.358,60.773 20.283,60.848 20.283,61.072 20.358,61.147 20.693,61.147 20.768,61.221 20.768,61.445 20.693,61.52 20.358,61.52 20.283,61.594 20.283,61.818 20.358,61.893 20.693,61.893 20.768,61.968 20.768,62.191 20.693,62.266 20.358,62.266 20.283,62.341 20.283,62.565 20.358,62.639 20.855,62.639 20.93,62.714 20.93,62.938 20.855,63.013 20.358,63.013 20.283,63.087 20.283,63.311 20.358,63.386 20.956,63.386 21.031,63.46 21.031,63.684 20.956,63.759 20.358,63.759 20.283,63.834 20.283,64.057 20.358,64.132 20.956,64.132 21.031,64.207 21.031,64.431 20.956,64.505 20.358,64.505 20.283,64.58 20.283,64.804 20.358,64.878 21.369,64.878 21.444,64.953 21.444,65.177 21.369,65.252 20.358,65.252 20.283,65.326 20.283,65.55 20.358,65.625 20.605,65.625 20.68,65.699 20.68,65.923 20.605,65.998 20.45,65.998 20.375,66.073 20.375,66.5 20.445,66.569 22.99,66.569 23.572,65.988 25.859,65.988 26.169,65.677 26.428,65.677 26.839,65.266 27.451,65.266 28.497,64.219 29.225,64.219 29.844,63.6 v1(30.5,63.6)
  S8 (SIG) w0.119: v1(30.5,48.15) 30.5,48.52 30.08,48.94 30.08,49.087 30.065,49.101 30.065,49.399 30.08,49.413 30.08,52.63 30.041,52.63 30.02,52.652 29.604,53.067 29.583,53.089 29.583,53.222 29.541,53.222 29.048,53.715 29.013,53.715 28.168,54.56 28.168,54.592 28.048,54.712 28.048,54.931 26.181,56.798 26.181,57.414 25.459,58.136 25.459,58.423 25.579,58.543 25.579,58.672 27.832,60.925 28.341,60.925 28.401,60.925 28.475,61 28.475,61.293 28.55,61.367 28.774,61.367 28.849,61.293 28.849,61 28.923,60.925 29.147,60.925 29.222,61 29.222,61.293 29.296,61.367 29.52,61.367 29.595,61.293 29.595,61 29.67,60.925 29.893,60.925 29.968,61 29.968,61.127 30.043,61.202 30.267,61.202 30.341,61.127 30.341,61 30.416,60.925 30.64,60.925 30.714,61 30.714,61.127 30.789,61.202 31.013,61.202 31.088,61.127 31.088,61 31.162,60.925 31.386,60.925 31.461,61 31.461,61.127 31.535,61.202 31.759,61.202 31.834,61.127 31.834,61 31.909,60.925 32.133,60.925 32.207,61 32.207,61.127 32.282,61.202 32.506,61.202 32.58,61.127 32.58,61 32.655,60.925 32.879,60.925 32.954,61 32.954,61.127 33.028,61.202 33.252,61.202 33.327,61.127 33.327,61 33.401,60.925 33.625,60.925 33.7,61 33.7,61.127 33.775,61.202 33.999,61.202 34.073,61.127 34.073,61 34.148,60.925 34.372,60.925 34.446,61 34.446,61.293 34.521,61.367 34.745,61.367 34.82,61.293 34.82,61 34.894,60.925 35.118,60.925 35.193,61 35.193,61.293 35.267,61.367 35.491,61.367 35.566,61.293 35.566,61 35.641,60.925 35.864,60.925 35.939,61 35.939,61.293 36.014,61.367 36.238,61.367 36.312,61.293 36.312,61 36.387,60.925 36.611,60.925 36.685,61 36.685,61.293 36.76,61.367 36.984,61.367 37.059,61.293 37.059,61 37.133,60.925 37.357,60.925 37.432,61 37.432,61.127 37.507,61.202 37.73,61.202 37.805,61.127 37.805,61 37.88,60.925 38.104,60.925 38.178,61 38.178,61.127 38.253,61.202 38.477,61.202 38.551,61.127 38.551,61 38.626,60.925 38.85,60.925 38.925,61 38.925,61.127 38.999,61.202 39.223,61.202 39.298,61.127 39.298,61 39.372,60.925 39.596,60.925 39.671,61 39.671,61.171 39.746,61.246 39.97,61.246 40.044,61.171 40.044,61 40.119,60.925 40.343,60.925 40.417,61 40.417,61.256 40.492,61.331 40.716,61.331 40.791,61.256 40.791,61 40.865,60.925 41.089,60.925 41.164,61 41.164,61.052 41.238,61.127 41.462,61.127 41.537,61.052 41.537,61 41.612,60.925 41.836,60.925 41.91,61 41.91,61.002 41.985,61.077 42.209,61.077 42.283,61.002 42.283,61 42.358,60.925 42.582,60.925 42.657,61 42.657,61.228 42.731,61.303 42.955,61.303 43.03,61.228 43.03,61 43.104,60.925 43.328,60.925 43.403,61 43.403,61.293 43.478,61.367 43.701,61.367 43.776,61.293 43.776,61 43.851,60.925 44.075,60.925 44.149,61 44.149,61.561 44.224,61.636 44.448,61.636 44.522,61.561 44.522,61 44.597,60.925 44.821,60.925 44.896,61 44.896,61.451 44.97,61.526 45.194,61.526 45.269,61.451 45.269,61 45.343,60.925 46.495,60.925 47.45,59.97 v1(47.45,59.6)
  S10 (SIG) w0.18: 25.825,63.6 v1(30.5,63.6)
DDR_A9: R609.2 U300.J4 U700.R3 U701.R3 | length 110
  S1 (SIG) w0.11: v1(55.488,59.195) 55.572,59.195 55.888,58.88 U300.J4@55.888,58.795
  S1 (SIG) w0.18: v1(29.575,67.65) 29.615,67.61 31.29,67.61 U700.R3@31.7,67.2 ; v1(31.3,51.35) 31.3,51.435 31.615,51.75 U701.R3@31.7,51.75
  S3 (SIG) w0.119: v1(29.575,67.65) 26.987,67.65 26.676,67.961 24.446,67.961 23.757,68.65 18.5,68.65 14.367,64.517 14.367,59.258 16.028,57.597 16.028,57.277 19.091,54.214 21.611,54.214 28.035,47.79 30.649,47.79 30.86,48.001 30.86,48.055 30.929,48.125 30.984,48.125 31.3,48.441 v1(31.3,51.35)
  S8 (SIG) w0.1: 51.9,59.5 52.092,59.5 52.221,59.63 55.138,59.63 55.488,59.28 v1(55.488,59.195)
  S8 (SIG) w0.119: v1(31.3,51.35) 31.3,52.167 31.039,52.429 30.954,52.429 30.912,52.471 30.648,52.735 cw(c30.732,52.819) 30.648,52.903 30.799,53.054 ccw(c30.746,53.107) 30.799,53.16 30.64,53.318 ccw(c30.588,53.265) 30.535,53.318 30.307,53.09 cw(c30.254,53.143) 30.201,53.09 30.043,53.248 cw(c30.096,53.301) 30.043,53.354 30.162,53.474 ccw(c30.11,53.526) 30.162,53.579 30.004,53.737 ccw(c29.951,53.685) 29.899,53.737 29.856,53.695 cw(c29.772,53.779) 29.688,53.695 28.75,54.633 28.75,54.741 28.75,59.21 28.861,59.321 28.921,59.381 28.921,60.231 28.996,60.306 29.219,60.306 29.294,60.231 29.294,59.65 29.369,59.575 29.593,59.575 29.667,59.65 29.667,60.231 29.742,60.306 29.966,60.306 30.04,60.231 30.04,59.223 30.115,59.149 30.339,59.149 30.414,59.223 30.414,60.231 30.488,60.306 30.712,60.306 30.787,60.231 30.787,59.819 30.861,59.744 31.085,59.744 31.16,59.819 31.16,60.231 31.235,60.306 31.459,60.306 31.533,60.231 31.533,60.057 31.608,59.983 31.832,59.983 31.906,60.057 31.906,60.231 31.981,60.306 32.205,60.306 32.28,60.231 32.28,60.057 32.354,59.983 32.578,59.983 32.653,60.057 32.653,60.231 32.727,60.306 32.951,60.306 33.026,60.231 33.026,60.057 33.101,59.983 33.325,59.983 33.399,60.057 33.399,60.231 33.474,60.306 33.698,60.306 33.772,60.231 33.772,60.057 33.847,59.983 34.071,59.983 34.146,60.057 34.146,60.231 34.22,60.306 34.444,60.306 34.519,60.231 34.519,60.057 34.593,59.983 34.817,59.983 34.892,60.057 34.892,60.231 34.967,60.306 35.19,60.306 35.265,60.231 35.265,60.057 35.34,59.983 35.564,59.983 35.638,60.057 35.638,60.231 35.713,60.306 35.937,60.306 36.012,60.231 36.012,60.057 36.086,59.983 36.31,59.983 36.385,60.057 36.385,60.231 36.459,60.306 36.683,60.306 36.758,60.231 36.758,60.057 36.833,59.983 37.056,59.983 37.131,60.057 37.131,60.231 37.206,60.306 37.43,60.306 37.504,60.231 37.504,60.057 37.579,59.983 37.803,59.983 37.877,60.057 37.877,60.231 37.952,60.306 38.176,60.306 38.251,60.231 38.251,60.057 38.325,59.983 38.549,59.983 38.624,60.057 38.624,60.231 38.698,60.306 38.922,60.306 38.997,60.231 38.997,60.057 39.072,59.983 39.296,59.983 39.37,60.057 39.37,60.231 39.445,60.306 39.669,60.306 39.743,60.231 39.743,60.057 39.818,59.983 40.042,59.983 40.117,60.057 40.117,60.231 40.191,60.306 40.415,60.306 40.49,60.231 40.49,60.057 40.564,59.983 40.788,59.983 40.863,60.057 40.863,60.231 40.938,60.306 41.162,60.306 41.236,60.231 41.236,59.819 41.311,59.744 41.535,59.744 41.609,59.819 41.609,60.231 41.684,60.306 41.908,60.306 41.983,60.231 41.983,59.819 42.057,59.744 42.281,59.744 42.356,59.819 42.356,60.231 42.43,60.306 42.654,60.306 42.729,60.231 42.729,59.819 42.804,59.744 43.027,59.744 43.102,59.819 43.102,60.231 43.177,60.306 43.401,60.306 43.475,60.231 43.475,59.819 43.55,59.744 43.774,59.744 43.848,59.819 43.848,60.231 43.923,60.306 44.147,60.306 44.222,60.231 44.222,59.819 44.296,59.744 44.52,59.744 44.595,59.819 44.595,60.231 44.669,60.306 44.893,60.306 44.968,60.231 44.968,59.946 45.043,59.872 45.267,59.872 45.341,59.946 45.341,60.025 45.416,60.1 45.7,60.1 46.216,60.1 46.871,59.445 46.871,59.36 47.21,59.021 47.69,59.021 48.029,59.36 48.029,59.445 48.03,59.446 48.115,59.446 48.128,59.46 48.284,59.46 48.298,59.446 48.755,59.446 48.765,59.436 48.765,59.351 48.976,59.14 49.274,59.14 49.485,59.351 49.485,59.436 49.549,59.5 50.266,59.5 50.351,59.415 50.649,59.415 50.734,59.5 51.9,59.5
  S10 (SIG) w0.18: 26.65,69.8 27.425,69.8 v1(29.575,67.65)
DDR_A10: R610.2 U300.F5 U700.L7 U701.L7 | length 123.7
  S1 (SIG) w0.11: v1(56.288,61.595) U300.F5@56.688,61.195
  S1 (SIG) w0.18: v1(26.9,51.375) 26.9,51.315 26.785,51.2 26.785,49.163 27.013,48.935 27.337,48.935 28.112,49.711 28.112,50.564 28.563,51.015 29.795,51.015 30.13,50.68 32.77,50.68 U701.L7@34.9,48.55 ; v1(32.775,65.45) 32.817,65.492 33.196,65.492 33.212,65.508 33.392,65.508 U700.L7@34.9,64
  S3 (SIG) w0.119: v1(26.9,51.375) 28.519,51.375 29.479,52.335 29.479,52.853 27.829,54.503 27.829,54.84 27.49,55.179 27.01,55.179 26.87,55.038 24.662,55.038 24.549,55.151 24.549,55.175 23.712,56.011 22.688,56.011 22.206,55.53 21.727,55.53 21.44,55.816 21.308,55.816 17.75,59.375 17.75,59.75 17.75,59.81 17.675,59.884 17.384,59.884 17.309,59.959 17.309,60.183 17.384,60.257 18.102,60.257 18.177,60.332 18.177,60.556 18.102,60.631 17.082,60.631 17.007,60.705 17.007,60.929 17.082,61.004 18.102,61.004 18.177,61.078 18.177,61.302 18.102,61.377 17.082,61.377 17.007,61.452 17.007,61.676 17.082,61.75 18.102,61.75 18.177,61.825 18.177,62.049 18.102,62.123 17.082,62.123 17.007,62.198 17.007,62.422 17.082,62.497 18.102,62.497 18.177,62.571 18.177,62.795 18.102,62.87 17.082,62.87 17.007,62.944 17.007,63.168 17.082,63.243 18.102,63.243 18.177,63.318 18.177,63.541 18.102,63.616 17.082,63.616 17.007,63.691 17.007,63.915 17.082,63.989 18.102,63.989 18.177,64.064 18.177,64.288 18.102,64.363 17.082,64.363 17.007,64.437 17.007,64.661 17.082,64.736 17.935,64.736 18.01,64.81 18.01,65.034 17.935,65.109 17.825,65.109 17.75,65.184 17.75,65.965 18.163,66.378 19.012,67.227 23.32,67.227 23.901,66.646 26.131,66.646 26.442,66.335 26.7,66.335 27.112,65.923 27.723,65.923 28.769,64.877 29.431,64.877 29.898,65.344 29.898,65.38 29.968,65.45 v1(32.775,65.45)
  S8 (SIG) w0.1: 51.9,63.545 55.633,63.545 55.933,63.244 55.933,61.949 v1(56.288,61.595)
  S8 (SIG) w0.119: v1(26.9,51.375) 26.935,51.41 26.935,53.79 24.583,56.142 24.583,60.108 27.715,63.24 41.522,63.24 41.826,63.545 51.9,63.545
  S10 (SIG) w0.18: 25.925,65.225 29.62,65.225 29.845,65.45 v1(32.775,65.45)
DDR_A11: R611.2 U300.G4 U700.R7 U701.R7 | length 111
  S1 (SIG) w0.11: v1(55.488,60.795) U300.G4@55.888,60.395
  S1 (SIG) w0.18: v1(30.425,49.25) 31,49.25 U701.R7@31.7,48.55 ; v1(31.3,64.4) U700.R7@31.7,64
  S3 (SIG) w0.119: v1(30.425,49.25) 30.425,53.316 28.706,55.036 28.706,55.203 27.853,56.056 26.647,56.056 26.507,55.915 25.358,55.915 25.218,56.056 24.908,56.056 24.075,56.888 21.897,56.888 21.25,57.535 21.25,58.225 21.25,58.285 21.175,58.359 21.062,58.359 20.987,58.434 20.987,58.658 21.062,58.732 21.633,58.732 21.707,58.807 21.707,59.031 21.633,59.106 21.062,59.106 20.987,59.18 20.987,59.404 21.062,59.479 21.633,59.479 21.707,59.553 21.707,59.777 21.633,59.852 21.062,59.852 20.987,59.927 20.987,60.151 21.062,60.225 21.633,60.225 21.707,60.3 21.707,60.524 21.633,60.598 21.062,60.598 20.987,60.673 20.987,60.897 21.062,60.972 21.633,60.972 21.707,61.046 21.707,61.27 21.633,61.345 21.062,61.345 20.987,61.419 20.987,61.643 21.062,61.718 21.633,61.718 21.707,61.793 21.707,62.016 21.633,62.091 21.062,62.091 20.987,62.166 20.987,62.39 21.062,62.464 21.509,62.464 21.584,62.539 21.584,62.763 21.509,62.838 21.325,62.838 21.25,62.912 21.25,64.375 21.261,64.386 21.75,64.875 22.425,64.875 22.8,65.25 23.156,65.25 23.23,65.325 23.23,65.694 23.305,65.769 23.529,65.769 23.603,65.694 23.603,64.921 23.678,64.847 23.902,64.847 23.977,64.921 23.977,65.694 24.051,65.769 24.275,65.769 24.35,65.694 24.35,64.921 24.424,64.847 24.648,64.847 24.723,64.921 24.723,65.694 24.798,65.769 25.022,65.769 25.096,65.694 25.096,64.921 25.171,64.847 25.395,64.847 25.469,64.921 25.469,65.694 25.544,65.769 25.768,65.769 25.843,65.694 25.843,64.921 25.917,64.847 26.141,64.847 26.216,64.921 26.216,65.175 26.29,65.25 26.35,65.25 26.545,65.25 26.986,64.81 27.013,64.81 27.453,64.369 27.988,64.369 28.357,64 29.134,64 29.894,63.24 31.449,63.24 31.66,63.451 31.66,64.04 v1(31.3,64.4)
  S8 (SIG) w0.1: 51.9,60.29 52.32,60.29 52.88,60.85 53.214,60.85 53.509,61.145 55.138,61.145 v1(55.488,60.795)
  S8 (SIG) w0.119: v1(30.425,49.25) 30.425,52.594 30.17,52.849 30.132,52.849 30.11,52.871 29.824,53.158 29.802,53.179 29.802,53.313 29.673,53.441 29.632,53.441 28.531,54.542 28.531,54.73 28.267,54.994 28.267,55.021 27.982,55.307 27.94,55.349 27.676,55.613 27.676,55.718 28.478,56.521 28.478,56.626 28.32,56.785 28.214,56.785 27.412,55.982 27.306,55.982 27.148,56.141 27.148,56.246 28.478,57.576 28.478,57.682 28.32,57.84 28.214,57.84 26.884,56.51 26.779,56.51 26.523,56.765 26.481,56.808 26.4,56.888 26.4,58.75 28.175,60.525 28.235,60.525 28.309,60.6 28.309,60.631 28.384,60.706 28.608,60.706 28.682,60.631 28.682,60.6 28.757,60.525 28.981,60.525 29.056,60.6 29.056,60.631 29.13,60.706 29.354,60.706 29.429,60.631 29.429,60.6 29.503,60.525 29.727,60.525 29.802,60.6 29.802,60.631 29.877,60.706 30.101,60.706 30.175,60.631 30.175,60.6 30.25,60.525 30.474,60.525 30.548,60.6 30.548,60.631 30.623,60.706 30.847,60.706 30.922,60.631 30.922,60.6 30.996,60.525 31.22,60.525 31.295,60.6 31.295,60.631 31.369,60.706 31.593,60.706 31.668,60.631 31.668,60.6 31.743,60.525 31.967,60.525 32.041,60.6 32.041,60.631 32.116,60.706 32.34,60.706 32.414,60.631 32.414,60.6 32.489,60.525 32.713,60.525 32.788,60.6 32.788,60.631 32.862,60.706 33.086,60.706 33.161,60.631 33.161,60.6 33.235,60.525 33.459,60.525 33.534,60.6 33.534,60.631 33.609,60.706 33.832,60.706 33.907,60.631 33.907,60.6 33.982,60.525 34.206,60.525 34.28,60.6 34.28,60.631 34.355,60.706 34.579,60.706 34.653,60.631 34.653,60.6 34.728,60.525 34.952,60.525 35.027,60.6 35.027,60.631 35.101,60.706 35.325,60.706 35.4,60.631 35.4,60.6 35.475,60.525 35.698,60.525 35.773,60.6 35.773,60.631 35.848,60.706 36.072,60.706 36.146,60.631 36.146,60.6 36.221,60.525 36.445,60.525 36.519,60.6 36.519,60.631 36.594,60.706 36.818,60.706 36.893,60.631 36.893,60.6 36.967,60.525 37.191,60.525 37.266,60.6 37.266,60.631 37.34,60.706 37.564,60.706 37.639,60.631 37.639,60.6 37.714,60.525 37.938,60.525 38.012,60.6 38.012,60.631 38.087,60.706 38.311,60.706 38.385,60.631 38.385,60.6 38.46,60.525 38.684,60.525 38.759,60.6 38.759,60.631 38.833,60.706 39.057,60.706 39.132,60.631 39.132,60.6 39.206,60.525 39.43,60.525 39.505,60.6 39.505,60.631 39.58,60.706 39.804,60.706 39.878,60.631 39.878,60.6 39.953,60.525 40.177,60.525 40.251,60.6 40.251,60.631 40.326,60.706 40.55,60.706 40.625,60.631 40.625,60.6 40.699,60.525 40.923,60.525 40.998,60.6 40.998,60.631 41.072,60.706 41.296,60.706 41.371,60.631 41.371,60.6 41.446,60.525 41.669,60.525 41.744,60.6 41.744,60.631 41.819,60.706 42.043,60.706 42.117,60.631 42.117,60.6 42.192,60.525 42.416,60.525 42.49,60.6 42.49,60.631 42.565,60.706 42.789,60.706 42.864,60.631 42.864,60.6 42.938,60.525 43.162,60.525 43.237,60.6 43.237,60.631 43.311,60.706 43.535,60.706 43.61,60.631 43.61,60.6 43.685,60.525 43.909,60.525 43.983,60.6 43.983,60.631 44.058,60.706 44.282,60.706 44.356,60.631 44.356,60.6 44.431,60.525 44.655,60.525 44.73,60.6 44.73,60.631 44.804,60.706 45.028,60.706 45.103,60.631 45.103,60.6 45.177,60.525 45.65,60.525 46.101,60.525 47.09,59.536 47.09,59.451 47.301,59.24 47.599,59.24 47.81,59.451 47.81,59.536 47.939,59.665 48.024,59.665 48.037,59.679 48.375,59.679 48.389,59.665 48.686,59.665 50.081,61.06 50.474,61.06 50.788,60.746 50.788,60.604 51.101,60.29 51.9,60.29
  S10 (SIG) w0.18: 25.86,64.215 26.065,64.01 30.662,64.01 30.702,64.05 30.95,64.05 v1(31.3,64.4)